# Altium PCB 25E_High_Voltage_Monitor_Rev2.PcbDoc
Units mil, origin at the board's own origin, x right, y up, seen from the top; angles counter-clockwise.
Board outline 5330 x 3160 mil, 2 copper layers (Top Layer, Bottom Layer); 59 components, 26 nets, 150 pads, 54 vias.
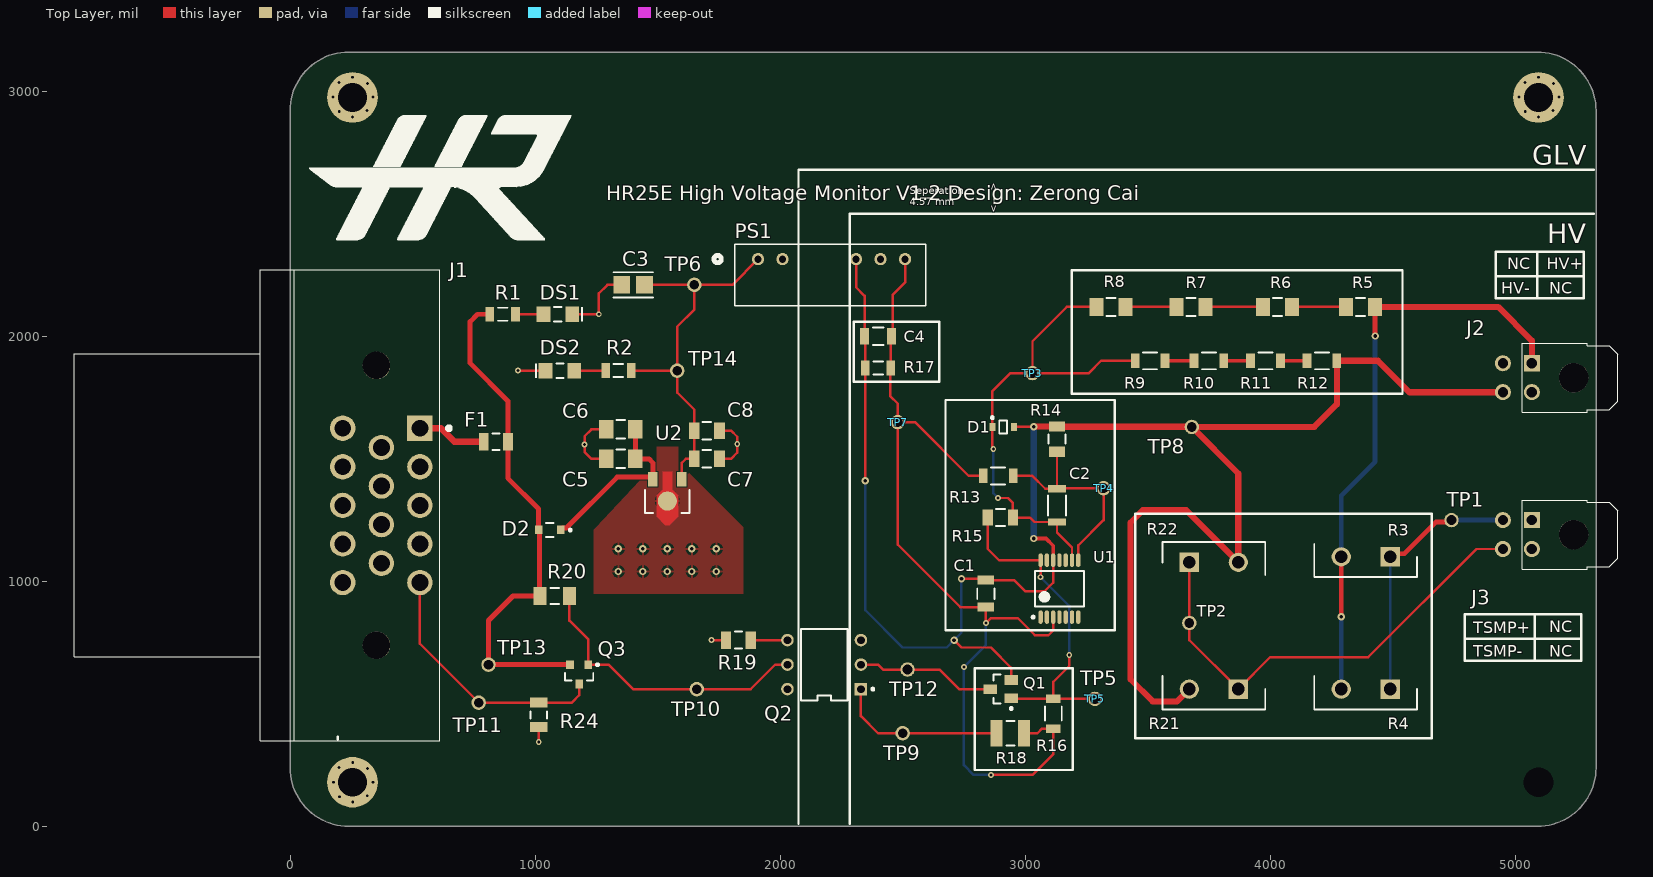
[diagram p0: Top Layer view]
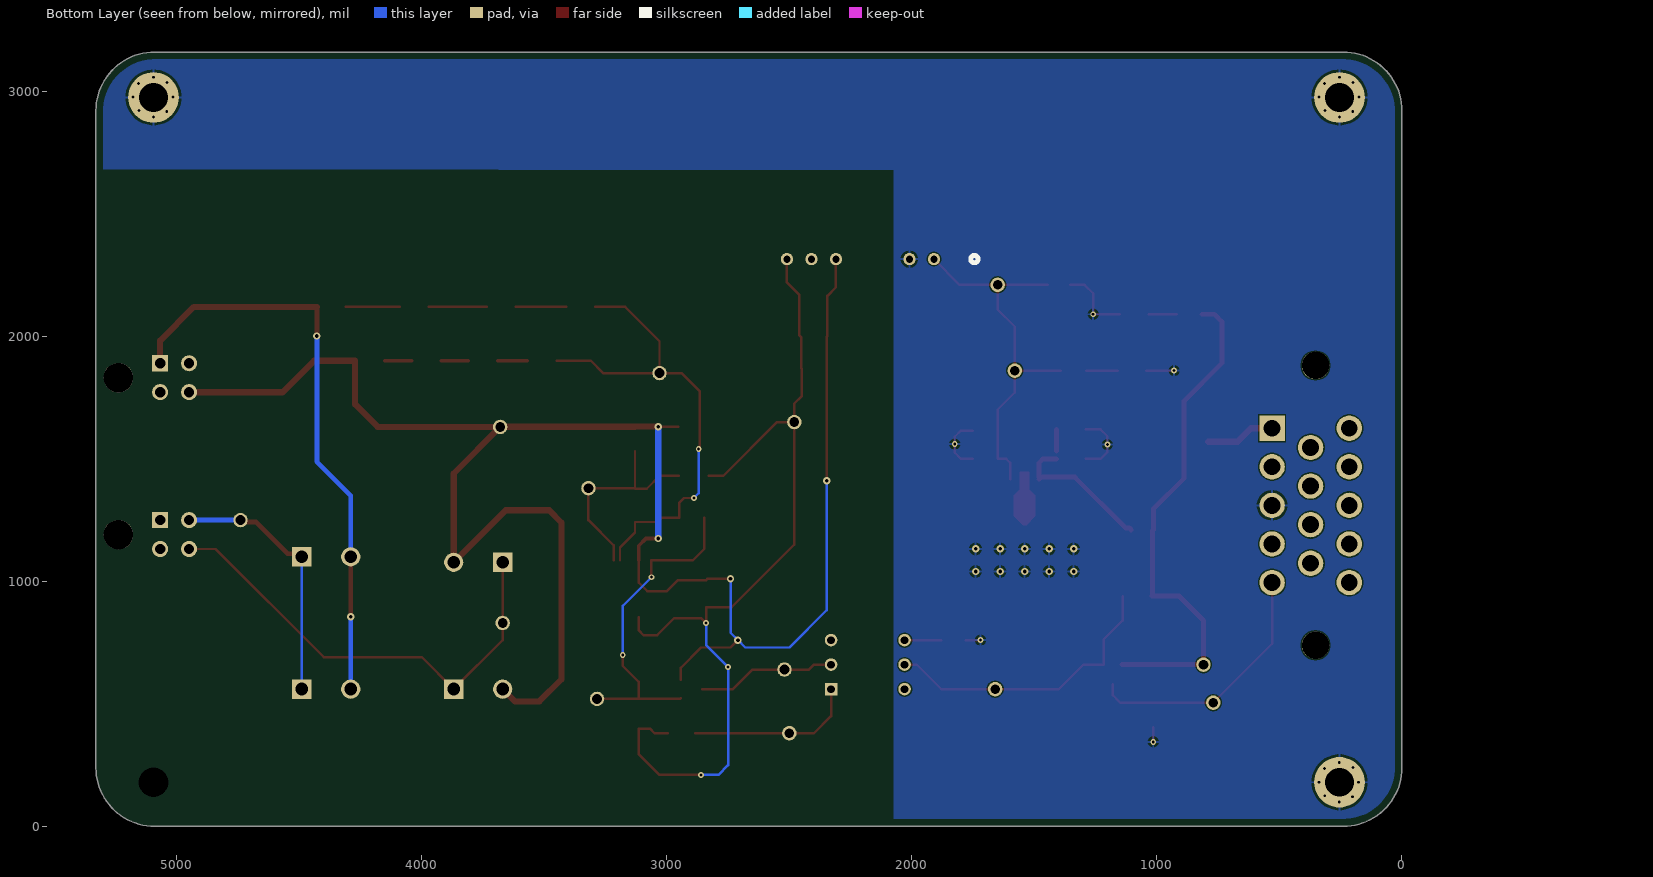
[diagram p1: Bottom Layer view, seen from below]
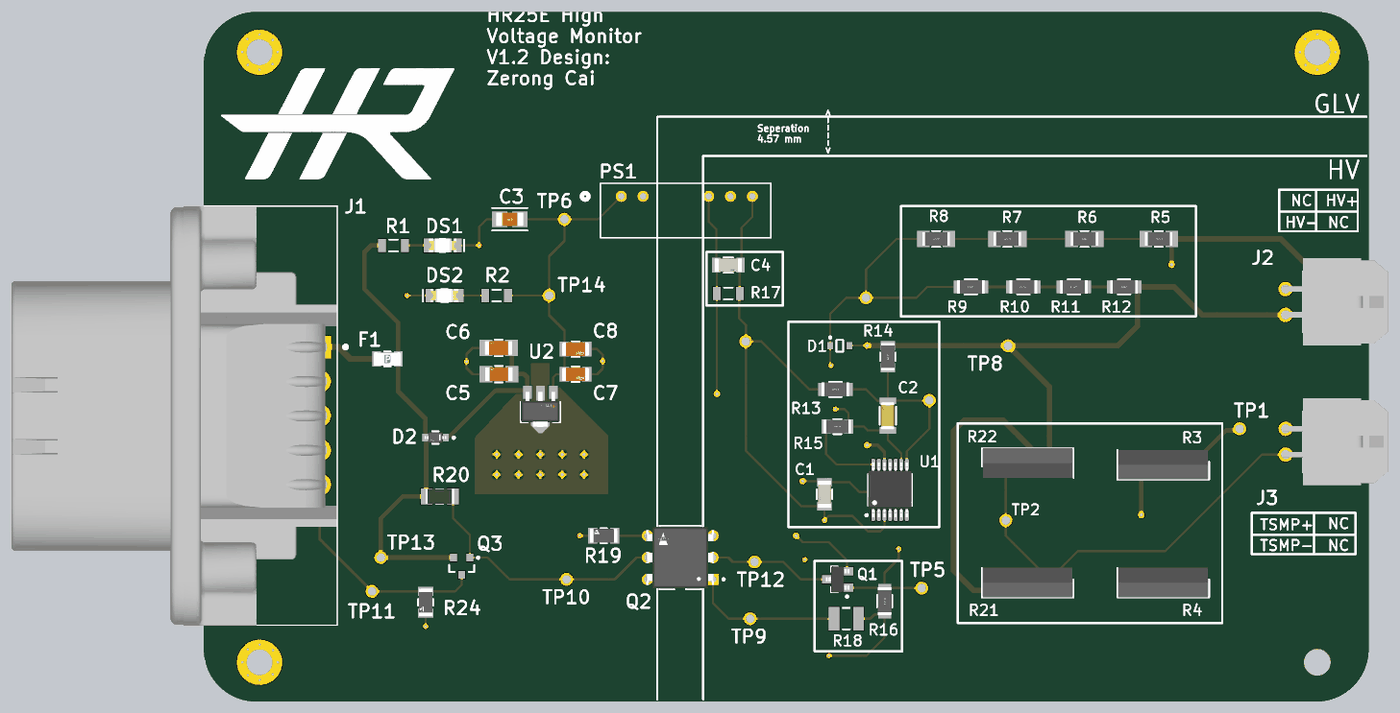
[diagram p2: 3D render of the assembled board from above, using the file's embedded part models]

## Layer stack, top to bottom
Top Solder: solder mask 0.4, Solder Resist, Dk 3.5
Top Layer: signal copper 1.4
Dielectric 1: dielectric 12.6, FR-4, Dk 4.8
Bottom Layer: signal copper 1.4
Bottom Solder: solder mask 0.4, Solder Resist, Dk 3.5

## Board outline
0,240 0,2920 cw(c240,2920) 240,3160 5090,3160 cw(c5090,2920) 5330,2920 5330,240 cw(c5090,240) 5090,0 240,0 cw(c240,240)

## Design rules (kind name [scope] priority, off if disabled: settings)
BoardOutlineClearance [All] p1: gap=30 ignorepadtopadclearanceinfootprint=FALSE except(0: Arc-SplitContinuation Track-SplitContinuation SMDPad-SplitContinuation THPad-SplitContinuation Via-SplitContinuation Fill-SplitContinuation Poly-SplitContinuation Region-SplitContinuation Text-SplitContinuation)
Clearance [All] p1: gap=5 ignorepadtopadclearanceinfootprint=FALSE except(0: Arc-Hole Track-Hole SMDPad-Hole THPad-Hole Via-Hole Fill-Hole Poly-Hole Region-Hole Text-Hole)
Height [All] p1: minheight=0 maxheight=2000 prefheight=500
HoleSize [All] p1: absolutevalues=TRUE maxlimit=200 minlimit=1 maxpercent=80.000 minpercent=20.000
MinimumSolderMaskSliver [All] p1: minsoldermaskwidth=3
PolygonConnect [All] p1: connectstyle=Relief reliefconductorwidth=10 reliefentries=4 polygonreliefangle="90 Angle" airgapwidth=10
RoutingVias [All] p1: holewidth=28 width=50 viastyle="Through Hole" minholewidth=6 minwidth=14 maxholewidth=28 maxwidth=50
SilkToSilkClearance [All] p1: silktosilkclearance=0
SilkToSolderMaskClearance [IsPad] p1: minsilkscreentomaskgap=0 clearancetoexposedcopper=TRUE
SolderMaskExpansion [All] p1: expansion=4 istentingtop=FALSE
Width [All] p1: maxlimit=135 minlimit=6 preferedwidth=10
25 further rules are at their usual default settings.

## Classes and differential pairs
component class GLV-Connectors: F1 J1
component class U_TSMP-Resistors: R3 R4 R21 R22 TP1 TP2
net class HV: ISOLATED-5V NetC2_1 NetC2_2 NetJ2_1 NetPS1_6 NetQ1_1 NetR5_2 NetR6_2 NetR7_2 NetR9_2 NetR10_2 NetR11_2 TS-
component class U_PowerTree: C5 C6 C7 C8 D2 DS1 DS2 R1 R2 TP13 TP14 U2
component class Optocoupler: K1 Q1 Q2 Q3 R18 R19 R20 R24 TP9 TP10 TP11 TP12 U4
component class "Isolated 5V-5V": C3 C4 PS1 R17 TP6 TP7 TP8
component class HV-Trigger: C1 C2 D1 R5 R6 R7 R8 R9 R10 R11 R12 R13 R14 R15 R16 TP3 TP4 TP5 U1
component class HV-Connectors: J2 J3

## Components (designator, comment, footprint, x,y, rotation, side; value= is the part's Value field where it differs from the comment)
C1 "0.1uF" FP-C1206C-EB-MFG 2840,950 r90 top value="0.10 μF"
C2 "0.1uF" FP-CGA5L-0_3-0_1-IPC_B 3130,1310 r90 top
C3 "1uF" FP-C3216-160-0_2-IPC_B 1400,2210 r180 top
C4 "0.1uF" FP-C1206C-EB-MFG 2400,2000 r180 top value="0.10 μF"
C5 "1.0uF" FP-1206-L_3_2_0_2-W_1_6_0-IPC_A 1350,1500 r180 top value=1uF
C6 "1.0uF" FP-1206-L_3_2_0_2-W_1_6_0-IPC_A 1349.09,1620 r180 top
C7 "0.1uF" FP-1206-L_3_2_0_2-W_1_6_0-IPC_C 1701.21,1500 r0 top
C8 "0.1uF" FP-1206-L_3_2_0_2-W_1_6_0-IPC_C 1701.21,1615 r0 top
D1 "MM3Z24VST1G" ONSC-SOD-323-2-477-02_V 2910,1630 r0 top
D2 "1SS404,H3F" FP-SOD-323-MFG 1060,1210 r180 top
DS1 "597-3311-407F" DIAL-597-3311-407F_V 1092.68,2090 r0 top
DS2 "597-3311-407F" DIAL-597-3311-407F_V 1101.34,1860 r180 top
F1 "0468003.NRHF" FP-437-MFG 840,1570 r0 top value=0.033Ω
J1 "Conn-Ampseal-776267-1" FOOTPRINT-AMPSEAL-776267-1 372.48,1309.96 r270 top
J2 "Conn-Molex-43045-0400" FOOTPRINT-MOLEX-43045-0400 5178.35,1830.94 r90 top
J3 "Conn-Molex-43045-0400" FOOTPRINT-MOLEX-43045-0400 5178.35,1190.94 r90 top
PS1 "TMV 0505S" TMV05-SINGLE_TRP 1910,2315 r0 top
Q1 "NDS355AN" FAIR-SOT-3_V 2900,560 r180 top
Q2 "4N37" FP-4N37-MFG 2180,660 r180 top
Q3 "NTR4502PT1G" ONSC-SOT-23-3-318-08_V 1180,620 r270 top
R1 "1.2k" RESC3216X70X50LL05T20 867.83,2090 r0 top
R2 "1.2k" RESC3216X70X50LL05T20 1340,1860 r180 top
R3 "15K" TO508P344X1041X2058-2P 4490,1100 r180 top
R4 "15K" TO508P344X1041X2058-2P 4490,560 r180 top
R5 "240k" FP-KTR18-IPC_A 4369.42,2119.68 r180 top
R6 "240k" FP-KTR18-IPC_A 4030,2119.68 r180 top
R7 "240k" FP-KTR18-IPC_A 3676.67,2119.68 r180 top
R8 "240k" FP-KTR18-IPC_A 3350.9,2119.68 r180 top
R9 "10K" FP-KTR18-MFG 3510,1900 r0 top value=10kR
R10 "10K" FP-KTR18-MFG 3750,1900 r0 top value=10kR
R11 "10K" FP-KTR18-MFG 3981.02,1900 r0 top
R12 "10K" FP-KTR18-MFG 4211.02,1900 r0 top
R13 "180k" FP-KTR18-MFG 2890,1430 r180 top
R14 "160k" FP-KTR18-IPC_C 3130,1580 r90 top
R15 "560K" FP-KTR18-IPC_C 2898.77,1260 r180 top
R16 "10K" FP-KTR18-MFG 3115,460 r90 top
R17 "200" RESC3216X70X50LL05T20 2400,1870 r0 top
R18 "1k" RESC3225X70X50NL20T20 2940,380 r180 top
R19 "100" FP-CRCW1206-e3-MFG 1829.8,760 r180 top
R20 "4.7k" RESC3216X60X45ML15T20 1080,940 r180 top
R21 "15K" TO508P344X1041X2058-2P 3870,560 r180 top
R22 "15K" TO508P344X1041X2058-2P 3669.96,1077.68 r0 top
R24 "20k" FP-CRCW1206-e3-MFG 1015,455 r270 top
TP1 "" FOOTPRINT-GENERIC-TP-VIA-1MM 4740,1250 r0 top
TP2 "" FOOTPRINT-GENERIC-TP-VIA-1MM 3670,830 r90 top
TP3 "" FOOTPRINT-GENERIC-TP-VIA-1MM 3030,1850 r90 top
TP4 "" FOOTPRINT-GENERIC-TP-VIA-1MM 3320,1380 r90 top
TP5 "" FOOTPRINT-GENERIC-TP-VIA-1MM 3285,520 r90 top
TP6 "" FOOTPRINT-GENERIC-TP-VIA-1MM 1650,2210 r90 top
TP7 "" FOOTPRINT-GENERIC-TP-VIA-1MM 2480,1650 r90 top
TP8 "" FOOTPRINT-GENERIC-TP-VIA-1MM 3680,1630 r90 top
TP9 "" FOOTPRINT-GENERIC-TP-VIA-1MM 2500,380 r90 top
TP10 "" FOOTPRINT-GENERIC-TP-VIA-1MM 1660,560 r90 top
TP11 "" FOOTPRINT-GENERIC-TP-VIA-1MM 770,505 r90 top
TP12 "" FOOTPRINT-GENERIC-TP-VIA-1MM 2520,640 r90 top
TP13 "" FOOTPRINT-GENERIC-TP-VIA-1MM 810,660 r90 top
TP14 "" FOOTPRINT-GENERIC-TP-VIA-1MM 1580,1860 r90 top
U1 "OpAmp Comparator Quad - TLV1704" TSOP65P640X120-14N 3140,970 r90 top
U2 "UA78L05CPK" FP-PK0003A-MFG 1540,1330 r180 top

## Footprints (in the part's own frame and the unit in brackets; to place one, negate y for a bottom-side part, rotate by r counter-clockwise, add the part's x,y. Pads: shape width x height; smd on the part's side, far side on the other; paste and mask are expansions set on the pad)
DIAL-597-3311-407F_V [mm] "SMD, 2-Leads, Body 1.5x3mm"
  rect 1.42x1.6 smd: 1(-1.49,0) 2(1.49,0)
  silkscreen extent -0.38,-0.75 2.6,0.75, body extent -1.6,-0.8 1.6,0.8, height 0.68
FAIR-SOT-3_V [mm] "SOT23, 3-Leads, Body 3.04x1.52mm, Pitch 0.95mm"
  rect 1.4x1 smd: 1(-1.1,0.95) 2(-1.1,-0.95) 3(1.1,0)
  silkscreen extent -1.23,-1.5 0.76,2.12, body extent -1.36,-1.52 1.36,1.52, height 1.12
FOOTPRINT-AMPSEAL-776267-1 [mm] "14 CKT RA GASKET SEALED AUTO"
  rect 2.625x2.625 hole 1.75: 1(-8,4)
  round 2.625 hole 1.75: 2(-4,4) 3(0,4) 4(4,4) 5(8,4) 6(-6,0) 7(-2,0) 8(2,0) 9(6,0) 10(-8,-4) 11(-4,-4) 12(0,-4) 13(4,-4) 14(8,-4)
  round 2.85 hole 2.85 unplated: None(-14.5,-0.5) None(14.5,-0.5)
  silkscreen extent -24.4,-31.85 24.4,7.2, body extent -24.38,-31.82 24.42,5.98, height 28.75
FOOTPRINT-GENERIC-TP-VIA-1MM [mm]
  round 1.5 / inner round 1.524 / far side round 1.5 hole 1: 1(0,0)
FOOTPRINT-MOLEX-43045-0400 [mm] "Molex Microfit 4 CKT RA"
  rect 1.67x1.67 hole 1.07: 1(1.5,2.8)
  round 1.67 hole 1.07: 2(-1.5,2.8) 3(1.5,5.8) 4(-1.5,5.8)
  round 3.05 hole 3.05 unplated: None(0,-1.52)
  silkscreen extent -3.57,-6.12 3.57,3.79, body extent -5.07,-6.12 5.08,6.12, height 8.64
FP-4N37-MFG [mm]
  rect 1.3x1.3 hole 0.8 paste-1000 mask+0: 1(-3.81,2.54)
  round 1.3 hole 0.8 paste-1000 mask+0: 2(-3.81,0) 3(-3.81,-2.54) 4(3.81,-2.54) 5(3.81,0) 6(3.81,2.54)
  silkscreen extent -5.16,-3.71 2.4,3.71, body extent -4.56,-3.81 4.56,3.81, height 0.25
FP-437-MFG [mm]
  rect 1x1.8 smd paste+0 mask+0: 1(-1.25,0) 2(1.25,0)
  silkscreen extent -0.38,-0.86 0.38,0.86, body extent -1.85,-1 1.85,1, height 0.25
FP-1206-L_3_2_0_2-W_1_6_0-IPC_A [mil]
  rect 59.24x75.05 smd paste+0 mask+0: 1(-59.09,0) 2(59.09,0)
  silkscreen extent -18,-38 18,38, body extent -108,-57 108,57, height 10
FP-1206-L_3_2_0_2-W_1_6_0-IPC_C [mil]
  rect 43.49x67.17 smd paste+0 mask+0: 1(-51.21,0) 2(51.21,0)
  silkscreen extent -18,-35 18,35, body extent -77,-39 77,39, height 10
FP-C1206C-EB-MFG [mm]
  rect 0.95x1.7 smd paste+0 mask+0: 1(-1.4,0) 2(1.4,0)
  silkscreen extent -0.55,-0.9 0.55,0.9, body extent -2,-1 2,1, height 0.25
FP-C3216-160-0_2-IPC_B [mil]
  rect 69.05x71.11 smd paste+0 mask+0: 1(-46.3,0) 2(46.3,0)
  silkscreen extent -81,-51 81,51, body extent -91,-45 91,45, height 10
FP-CGA5L-0_3-0_1-IPC_B [mm]
  rect 0.756x1.906 smd paste+0 mask+0: 1(-1.725,0) 2(1.725,0)
  silkscreen extent -1.05,-0.95 1.05,0.95, body extent -2.35,-1.2 2.35,1.2, height 0.25
FP-CRCW1206-e3-MFG [mm]
  rect 1.05x1.8 smd paste+0 mask+0: 1(-1.275,0) 2(1.275,0)
  silkscreen extent -0.38,-0.87 0.38,0.87, body extent -1.9,-1 1.9,1, height 0.25
FP-KTR18-IPC_A [mil]
  rect 57.31x73.16 smd paste+0 mask+0: 1(-59.1,0) 2(59.1,0)
  silkscreen extent -19,-37 19,37, body extent -107,-56 107,56, height 10
FP-KTR18-IPC_C [mil]
  rect 41.56x65.28 smd paste+0 mask+0: 1(-51.23,0) 2(51.23,0)
  silkscreen extent -19,-34 19,34, body extent -76,-38 76,38, height 10
FP-KTR18-MFG [mm]
  rect 0.9x1.5 smd paste+0 mask+0: 1(-1.55,0) 2(1.55,0)
  silkscreen extent -0.72,-0.87 0.72,0.87, body extent -2.1,-0.97 2.1,0.97, height 0.25
FP-PK0003A-MFG [mm]
  rect 1x1.5 smd paste+0 mask+0: 1(-1.5,-2.203) 3(1.5,-2.203)
  round 1.98 smd paste+0 mask+0: 2(0,0.058)
  Top Layer region: 0,-2.953 -0.5,-2.953 -0.5,-1.152 -1.1,-0.553 -1.1,1.647 -0.2,2.548 0.2,2.548 1.1,1.647 1.1,-0.553 0.5,-1.152 0.5,-2.953
  silkscreen extent -2.3,-1.08 2.3,1.3, body extent -2.55,-3.05 2.55,2.65, height 0.25
FP-SOD-323-MFG [mm]
  rect 0.8x0.9 smd paste+0 mask+0: 1(-1.15,0) 2(1.15,0)
  silkscreen extent -2.25,-0.72 0.38,0.72, body extent -1.65,-0.82 1.65,0.82, height 0.25
ONSC-SOD-323-2-477-02_V [mm] "SOD, 2-Leads, Body 1.7x1.25mm"
  rect 0.63x0.83 smd: 1(-1.115,0) 2(1.115,0)
  silkscreen extent -1.24,-0.67 0.4,1.09, body extent -0.85,-0.63 0.85,0.63, height 1.06
ONSC-SOT-23-3-318-08_V [mm] "SOT23, 3-Leads, Body 2.92x1.3mm, Pitch 0.95mm"
  rect 0.9x0.8 smd: 1(-1,0.95) 2(-1,-0.95) 3(1,0)
  silkscreen extent -1.12,-1.46 0.65,2.03, body extent -0.65,-1.46 0.65,1.46, height 1.11
RESC3216X60X45ML15T20 [mm] "Chip Resistor, 2-Leads, Body 3.3x1.75mm, IPC Low Density"
  rect 1.35x1.85 smd: 1(-1.525,0) 2(1.525,0)
  silkscreen extent -0.45,-0.82 0.45,0.82, body extent -1.65,-0.87 1.65,0.87, height 0.6
RESC3216X70X50LL05T20 [mm] "Chip Resistor, 2-Leads, Body 3.20x1.60mm, IPC High Density"
  rect 0.9x1.55 smd: 1(-1.325,0) 2(1.325,0)
  silkscreen extent -0.5,-0.67 0.5,0.67, body extent -1.63,-0.82 1.62,0.82, height 0.7
RESC3225X70X50NL20T20 [mm] "Chip Resistor, 2-Leads, Body 3.20x2.50mm, IPC Medium Density"
  rect 1.25x2.7 smd: 1(-1.425,0) 2(1.425,0)
  silkscreen extent -0.4,-1.25 0.4,1.25, body extent -1.7,-1.35 1.7,1.35, height 0.7
TMV05-SINGLE_TRP [mil]
  round 50 hole 30 mask+0: 1(0,0) 2(100,0) 5(400,0) 6(500,0) 7(600,0)
  silkscreen extent -180,-190 685,60, body extent 0,0 10,10, height 10
TO508P344X1041X2058-2P [mm]
  rect 1.995x1.995 / inner round 1.995 / far side rect 1.995x1.995 hole 1.33: 1(0,0)
  round 1.995 hole 1.33: 2(5.08,0)
  silkscreen extent -2.8,-1.34 7.88,2.1, body extent -2.67,-1.34 7.75,2.1, height 19.56
TSOP65P640X120-14N [mm] "TSOP, 14-Leads, Body 5.00x4.40mm, Pitch 0.65mm, IPC Medium Density"
  oval 1.4x0.45 smd: 1(-2.95,1.95) 2(-2.95,1.3) 3(-2.95,0.65) 4(-2.95,0) 5(-2.95,-0.65) 6(-2.95,-1.3) 7(-2.95,-1.95) 8(2.95,-1.95) 9(2.95,-1.3) 10(2.95,-0.65) 11(2.95,0) 12(2.95,0.65) 13(2.95,1.3) 14(2.95,1.95)
  silkscreen extent -3.07,-2.55 1.85,2.85, body extent -3.2,-2.55 3.2,2.55, height 1.2

## Part data
C1 C4: library part CMP-1037-04229-2, "CAP CER 0.1UF 250V X7R 1206", Capacitance="0.10 μF", Manufacturer=KEMET, Manufacturer Part Number=C1206C104KARACTU, Package=C1206C-EB, Temperature="-55°C to +150°C", Temperature Characteristic=X7R, Temperature Coefficient=15%, Temperature Range High=+150°C, Temperature Range Low=-55°C, Tolerance=0.1, Voltage Rating="250 V", Automotive=Yes, Automotive Grade="Grade 0", Category=Cap, ComponentLink2Description=Datasheet, ComponentLink2URL=https://content.kemet.com/datasheets/KEM_C1007_X8R_ULTRA_150C_SMD.pdf, Device Class L1="Passive Components", Device Class L2=Capacitors, Device Class L3="Ceramic Capacitors", Digikey Description="CAP CER 0.1UF 250V X7R 1206", Height=0.88mm, Ipc Land Pattern Name=CAPC320160X78, Lead Free=Yes, Material=Ceramic, Mouser Description="Multilayer Ceramic Capacitors MLCC - SMD/SMT 250volts 0.1uF X7R 10%", Octopart=https://octopart.com/c1206c104karactu-kemet-193627, RoHS=TRUE
C2: library part CMP-08246-001673-1, "Cap Ceramic 100nF 450V X7T 10% Pad SMD 1206 +125°C Automotive T/R", Capacitance=100nF, Case Code (Imperial)=1206, Case Code (Metric)=3216, Dielectric=X7T, Max Operating Temperature=125°C, Min Operating Temperature=-55°C, Package Quantity=1, Ratings=AEC-Q200, Tolerance=10%, Voltage Rating=450V, Case/Package=1206, Depth=1.6mm, Features="Soft Termination", Height=1.6mm, Lead Free="Lead Free", Length=3.2mm, Mount="Surface Mount", Packaging="Tape and Reel", REACH SVHC="No SVHC", Termination=SMD/SMT, Thickness=0.075inch, Voltage Rating (DC)=450V, Weight=0.000571oz, Width=0.063inch
C3: library part CMP-2000-05402-2, "Multilayer Ceramic Capacitors 1uF ±10% 50V X7R SMD 1206", Case Code (Imperial)=1206, Case Code (Metric)=3216, Dielectric=X7R, Dielectric Material=Ceramic, Max Operating Temperature=125°C, Min Operating Temperature=-55°C, Package Quantity=2000, Tolerance=10%, Voltage=25V, Voltage Rating=50V, Capacitance=1uF, Case/Package=1206, Depth=1.6mm, Height=1.6mm, Lead Free="Lead Free", Length=0.126inch, Mount="Surface Mount", Number of Pins=2, Packaging="Tape and Reel", Radiation Hardening=No, REACH SVHC="No SVHC", Resistor Type=Ceramic, RoHS Compliant=Yes, Series=C, Termination=SMD/SMT, Thickness=0.071inch, Voltage Rating (DC)=50V, Weight=0.000571oz, Width=0.063inch
C5: library part CMP-2000-05866-2, "General Purpose Ceramic Capacitor, 1206, 1uF, 10%, X7R, 15%, 50V", Capacitance=1uF, Capacitor Type=Ceramic, Case Code (Imperial)=1206, Case Code (Metric)=3216, Dielectric=X7R, Manufacturer="Kyocera AVX", Manufacturer Part Number=12065C105KAT2A, Max Operating Temperature=125°C, Min Operating Temperature=-55°C, Package Quantity=1, Package Shape=Rectangular, Package Style=SMTMeter, Rated DC Voltage (URdc)=50V, Supplier Part Number=478-KGM31HR71H105KUCT-ND, Tolerance=10%, Voltage=25V, Case/Package=1206, Category="Ceramic Capacitors", ComponentLink1Description=https://datasheet.ciiva.com:443/pdfs/VipMasterIC/IC/AVXC/AVXC-S-A0004824845/AVXC-S-A0004824845-1.pdf?src-supplier=IHS+Markit, ComponentLink1URL=https://datasheet.ciiva.com:443/pdfs/VipMasterIC/IC/AVXC/AVXC-S-A0004824845/AVXC-S-A0004824845-1.pdf?src-supplier=IHS+Markit, Construction=Flat, Contact Plating=Tin, Depth=1.6mm, Dielectric Material=Ceramic, Dissipation Factor=2.5%, Height=1.78mm, JESD-609 Code=e3, Lead Free="Lead Free", Length=3.2mm, Mount="Surface Mount", Mounting Technology="Surface Mount", Multilayer=Yes, Number of Pins=2, Packaging="Tape and Reel", Pins=2, Pricing="1=0.36, 10=0.212, 100=0.1385, 1000=0.10054, 2000=0.09094, 4000=0.08697, 6000=0.08446, 10000=0.08191, 14000=0.08036, 20000=0.07843, 50000=0.07526, 100000=0.07178 (USD)", Radiation Hardening=No, REACH SVHC="No SVHC", Reach SVHC Compliant=Yes, RoHS=Yes, RoHS Compliant=Yes, Series=-, Stock=33721, Supplier=Digikey, Temperature Characteristics Code=X7R, Terminal Finish=Nickel, Termination=SMD/SMT, Thickness=0.07inch, Tolerance  (fill in as +-)=10%, Tolerance (fill in as +-)=10%, Voltage Rating=50V, Voltage Rating (DC)=50V, Width=0.063inch
C6: library part CMP-2000-05866-2, "General Purpose Ceramic Capacitor, 1206, 1uF, 10%, X7R, 15%, 50V", Capacitance=1uF, Case Code (Imperial)=1206, Case Code (Metric)=3216, Dielectric=X7R, Max Operating Temperature=125°C, Min Operating Temperature=-55°C, Package Quantity=1, Tolerance=10%, Voltage=25V, Voltage Rating=50V, Case/Package=1206, Construction=Flat, Contact Plating=Tin, Depth=1.6mm, Dissipation Factor=2.5%, Height=1.78mm, Lead Free="Lead Free", Length=3.2mm, Mount="Surface Mount", Number of Pins=2, Packaging="Tape and Reel", Radiation Hardening=No, REACH SVHC="No SVHC", RoHS Compliant=Yes, Series=-, Termination=SMD/SMT, Thickness=0.07inch, Voltage Rating (DC)=50V, Width=0.063inch
C7 C8: library part CMP-04427-013576-1, "General Purpose Ceramic Capacitor, 1206, 100nF, 5%, X7R, 15%, 100V", Capacitance=100nF, Case Code (Imperial)=1206, Case Code (Metric)=3216, Dielectric=X7R, Dielectric Material=Ceramic, Max Operating Temperature=125°C, Min Operating Temperature=-55°C, Package Quantity=1, Tolerance=5%, Voltage=100V, Case/Package=1206, Construction=Flat, Contact Plating=Tin, Depth=1.6mm, Height=1.27mm, Lead Free="Lead Free", Length=3.2mm, Mount="Surface Mount", Number of Pins=2, Packaging="Tape and Reel", Radiation Hardening=No, REACH SVHC="No SVHC", RoHS Compliant=Yes, Series=-, Termination=SMD/SMT, Thickness=0.05inch, Voltage Rating=100V, Voltage Rating (DC)=100V, Width=0.063inch
D1: library part CMP-1060-00674-1, "Zener Voltage Regulator, 300 mW, 2-Pin SOD-323, Pb-Free, Tape and Reel", Manufacturer="On Semiconductor", PartNumber=MM3Z36VT1G, ComponentLink1Description="Manufacturer URL", ComponentLink1URL=http://www.onsemi.com/, ComponentLink2Description=Datasheet, ComponentLink2URL=http://www.onsemi.cn/pub_link/Collateral/MM3Z2V4T1-D.PDF, ComponentLink3Description="Package Specification", ComponentLink3URL=http://www.onsemi.com/pub_link/Collateral/477-02.PDF.1, DatasheetVersion="Rev. 9", Mounting Technology="Surface Mount", P Max (W)=0.3, PackageDescription="2-Pin SOD, Body 1.7 x 1.25 mm", PackageReference=SOD-323-2-477-02, PackageVersion="Rev. H, 03/2007", Packing="Tape and Reel", RoHS=Pb-Free, VZ Typ (V)=36
D2: library part CMP-35905-000002-1, "DIODE SCHOTTKY 20V 300MA USC", Average Rectified Current=300mA, Case/Package=SOD, Max Operating Temperature=100°C, Max Repetitive Reverse Voltage (Vrrm)=25V, Max Reverse Voltage (DC)=20V, Min Operating Temperature=-40°C, Contact Plating=Tin, Element Configuration=Single, Forward Current=300mA, Mount="Surface Mount", Packaging="Tape and Reel"
DS1 DS2: library part CMP-007-00045-2, "Single Color LED, Green, Water Clear, 2mm", Forward Voltage=2.5V, Max Operating Temperature=85°C, Min Operating Temperature=-30°C, Mounting Technology="Surface Mount", Pins=2, RoHS Compliant=Yes
F1: library part CMP-08605-000049-1, "FUSE BRD MNT 3A 32VAC 35VDC 1206", Fuse Current=3A, Fuse Interrupt Ac Current=50A, Fuse Voltage Drop=0.14V, Manufacturer="Littelfuse Inc", Manufacturer Part Number=0437003.WR, Max Fuse Ac Voltage=32V, Max Fuse Dc Voltage=35V, Package=437, Resistance=0.033Ω, Temperature="-55°C to +150°C", Temperature Range High=+150°C, Temperature Range Low=-55°C, Automotive=No, Category=Fuse, ComponentLink2Description=Datasheet, ComponentLink2URL=https://www.littelfuse.com/~/media/electronics/datasheets/fuses/littelfuse_fuse_437_datasheet.pdf.pdf, Device Class L1="Circuit Protection", Device Class L2=Fuses, Device Class L3=unset, Digikey Description="FUSE BRD MNT 3A 32VAC 35VDC 1206", Fuse Blow Speed=Fast, Fuse I2T=0.506A2Sec, Fuse Interrupt Dc Current=50A, Height=0.8639mm, Ipc Land Pattern Name=CAPC320163X82, Lead Free=Yes, Mouser Description="Surface Mount Fuses 32V FA 1206 3A", Octopart=https://octopart.com/0437003.wr-littelfuse-8600121, RoHS=TRUE, Voltage Rating=32V
J1: library part CMP-035-000002-1, "AMPSEAL RA 14ckt Faced w/ Gasket Automotive", Package=None, Availability=Unavailable, Design Item ID=Conn-Ampseal-776267-1, EU_RoHS_Compliance=Compliant, MF="TE Connectivity", MP=776267-1, Price=None, SnapEDA_Link=https://www.snapeda.com/parts/776267-1/TE%20Connectivity%20AMP%20Connectors/view-part/?ref=snap, Source=Connectors.SchLib, TE_purchase_URL=https://www.te.com/usa-en/product-776267-1.html?te_bu=Cor&te_type=disp&te_campaign=seda_glo_cor-seda-global-disp-prtnr-fy19-seda-model-bom-cta_sma-317_1&elqCampaignId=32493
J2 J3: library part CMP-035-000005-2, "Microfit RA 4ckt Std/Econ", Package=None, Availability=Unavailable, Design Item ID=Conn-Molex-43045-0400, MF=Molex, MP=43045-0400, Price=None, SnapEDA_Link=https://www.snapeda.com/parts/43045-0400/Molex/view-part/?ref=snap, Source=Connectors.SchLib
PS1: library part CMP-053-000000-4, "No Description Available", Built_By=EMA_Justin, Copyright="Copyright (C) 2018 Accelerated Designs. All rights reserved", Datasheet=https://www.mouser.com/datasheet/2/687/tmv-519347.pdf, Design Item ID="TMV 0505S", Manufacturer_Part_Number="TMV 0505S", RefDes=RefDes, Source=2021-05-26_16-57-50.SchLib, SourceLibrary=Traco_Power_2020-05-29, Type=DEV, Vendor="Traco Power"
Q1: library part CMP-2000-06834-1, "N-Channel Logic Level Enhancement Mode Field Effect Transistor, 30 V, 1.7 A, -55 to150 degC, 3-Pin SOT-3, RoHS, Tape and Reel", Manufacturer=FairchildSemiconductor, Maximum Continuous Drain Current=1.7A, Maximum Drain Source Voltage=30V, Maximum Gate Source Voltage=±20V, Operating Temperature=-55to150°C, Package=3SuperSOT, Package Description="3-Pin Small Outline Transistor, Body 2.92 x 1.4 mm, Pitch 0.95 mm", Package Reference=SOT-3, Category=MOSFET, Channel Mode=Enhancement, Channel Type=N, Datasheet URL=https://www.fairchildsemi.com/datasheets/ND/NDS355AN.pdf, Datasheet Version=01/1997, Manufacturer URL=https://www.fairchildsemi.com/, Mounting=SurfaceMount, Mounting Technology=SurfaceMount, Package URL=https://www.fairchildsemi.com/package-drawings/MA/MA03B.pdf, Packaging=Tape&Reel, RDS-on=85@10VmOhm, Typical Fall Time=5ns, Typical Rise Time=32ns, Typical Turn-Off Delay Time=13ns, Typical Turn-On Delay Time=10ns
Q2: library part CMP-2000-05615-2, Case/Package=PDIP, Collector Emitter Breakdown Voltage=30V, Current Transfer Ratio=50%, Forward Current=50mA, Forward Voltage=1.5V, Input Current=10mA, Isolation Voltage=5kV, Max Collector Current=100mA, Max Operating Temperature=100°C, Max Power Dissipation=70mW, Min Operating Temperature=-55°C, Reverse Breakdown Voltage=6V, Voltage Rating (DC)=1.3V, Approvals="BSI, FIMKO, UL", Collector Emitter Voltage (VCEO)=30V, Fall Time=10µs, Lead Free="Lead Free", Max Input Current=50mA, Max Output Voltage=30V, Mount="Through Hole", NexarPartId=55433899, Number of Channels=1, Number of Elements=1, Number of Pins=6, Output Current per Channel=50mA, Output Voltage=30V, Power Dissipation=70mW, Radiation Hardening=No, REACH SVHC=Unknown, Rise Time=10µs, RoHS=Compliant, Schedule B="8541408000, 8541408000"
Q3: library part CMP-1058-00734-1, "Power MOSFET, -30 V, -1.95 A, Single, P-Channel, 3-Pin SOT-23, Pb-Free, Tape and Reel", Manufacturer="On Semiconductor", Package Type=SOT-23-3, Channel Polarity="P Channel", Ciss Typ (pF)=200, ComponentLink1Description="Manufacturer URL", ComponentLink1URL=http://www.onsemi.com/, ComponentLink2Description=Datasheet, ComponentLink2URL=http://www.onsemi.cn/pub_link/Collateral/NTR4502P-D.PDF, ComponentLink3Description="Package Specification", ComponentLink3URL=http://www.onsemi.cn/pub_link/Collateral/318-08.PDF, Configuration=Single, Coss Typ (pF)=80, Crss Typ (pF)=50, DatasheetVersion="Rev. 5", ID Max (A)=1.95, Mounting Technology="Surface Mount", PackageDescription="3-Pin Small Outline Transistor, Body 2.92 x 1.3 mm, Pitch 0.95 mm", PackageReference=SOT-23-3-318-08, PackageVersion="Rev. AP, 11/2009", Packing="Tape and Reel", PartNumber=NTR4502PT1G, RoHS=Pb-Free, V(BR)DSS Min (V)=30, VGS Max (V)=20, VGS(th) Max (V)=3
R1 R2: library part CMP-2003-00061-1, Manufacturer=Panasonic, Part Number=ERJ8ENF1201V
R3 R4 R21 R22: library part MP925-15.0K-1%, "Thick Film Resistors - Through Hole 15K ohm 25W 1% TO-220 PKG PWR FILM", Manufacturer_Name=Caddock, Mouser Part Number=684-MP925-15K, Supplier Part Number 1=MP925-15.0KF-ND, Datasheet Link=http://www.caddock.com/Online_catalog/Mrktg_Lit/MP9000_Series.pdf, Geometry.Height=3.44mm, Manufacturer_Part_Number=MP925-15.0K-1%, Mouser Price/Stock=https://www.mouser.co.uk/ProductDetail/Caddock/MP925-15.0K-1?qs=3xGhc7tteJWFgUsHgFGqHw%3D%3D, Supplier 1=Digikey
R5 R6 R7 R8: library part CMP-08839-030423-1, "Res Thick Film 1206 240kΩ 1% 0.1W ±100ppm/°C Automotive Paper T/R", Case Code (Imperial)=1206, Case Code (Metric)=3216, Max Operating Temperature=155°C, Max Power Dissipation=250mW, Min Operating Temperature=-55°C, Package Quantity=1, Resistance=240kR, Resistor Type="Thick Film", Temperature Coefficient=100ppm/°C, Tolerance=1%, Case/Package=1206, Features="Automotive AEC-Q200", Height=0.026inch, Length=0.126inch, Number of Terminations=2, Packaging="Cut Tape", RoHS Compliant=Yes, Series=KTR, Width=0.063inch
R9 R10: library part CMP-08839-030597-1, "Res Thick Film 1206 10kΩ 1% 0.1W ±100ppm/°C Automotive Paper T/R", Case Code (Imperial)=1206, Case Code (Metric)=3216, Manufacturer=Rohm, Manufacturer Part Number=KTR18EZPF1002, Max Operating Temperature=155°C, Max Power Dissipation=250mW, Min Operating Temperature=-55°C, Package Height=0.55mm, Package Length=3.2mm, Package Quantity=1, Package Shape=Rectangular, Package Width=1.6mm, Rated Temperature=70°C, Resistance=10kR, Resistor Type="Thick Film", Supplier Part Number=755-KTR18EZPF1002, Temperature Coefficient=100ppm/°C, Temperature Coefficient (ppm/Cel)=100, Tolerance=1%, Working Voltage=500V, Case/Package=1206, Category="Chip SMD Resistors", ComponentLink1Description=https://datasheet.ciiva.com:443/pdfs/VipMasterIC/IC/ROHM/ROHM-S-A0008988694/ROHM-S-A0008988694-1.pdf?src-supplier=IHS+Markit, ComponentLink1URL=https://datasheet.ciiva.com:443/pdfs/VipMasterIC/IC/ROHM/ROHM-S-A0008988694/ROHM-S-A0008988694-1.pdf?src-supplier=IHS+Markit, ComponentLink2Description=https://datasheet.ciiva.com/2470/ktr-2470612.pdf?src-supplier=Digikey, ComponentLink2URL=https://datasheet.ciiva.com/2470/ktr-2470612.pdf?src-supplier=Digikey, ComponentLink3Description=https://datasheet.ciiva.com/2470/ktr-2470613.pdf?src-supplier=Digikey, ComponentLink3URL=https://datasheet.ciiva.com/2470/ktr-2470613.pdf?src-supplier=Digikey, ComponentLink4Description=https://datasheet.ciiva.com/2470/ktr-2470614.pdf?src-supplier=Digikey, ComponentLink4URL=https://datasheet.ciiva.com/2470/ktr-2470614.pdf?src-supplier=Digikey, Construction=Rectangular, Features="Automotive AEC-Q200", Height=0.026inch, JESD-609 Code=e3, Length=0.126inch, Mounting Technology="Surface Mount", Number of Terminations=2, Packaging="Tape and Reel", Pins=2, Power=250mW, Pricing="1=0.21, 10=0.105, 50=0.105, 100=0.062, 1000=0.038, 10000=0.03 (USD)", Reach SVHC Compliant=Yes, Reference Standard="TS 16949", RoHS=Yes, RoHS Compliant=Yes, Series=KTR, Stock=9747, Supplier=Mouser, Terminal Finish=Tin, Termination=Wraparound, Width=0.063inch
R11 R12 R16: library part CMP-08839-030597-1, "Res Thick Film 1206 10kΩ 1% 0.1W ±100ppm/°C Automotive Paper T/R", Case Code (Imperial)=1206, Case Code (Metric)=3216, Max Operating Temperature=155°C, Max Power Dissipation=250mW, Min Operating Temperature=-55°C, Package Quantity=1, Resistance=10kR, Resistor Type="Thick Film", Temperature Coefficient=100ppm/°C, Tolerance=1%, Case/Package=1206, Features="Automotive AEC-Q200", Height=0.026inch, Length=0.126inch, Number of Terminations=2, Packaging="Tape and Reel", RoHS Compliant=Yes, Series=KTR, Width=0.063inch
R13: library part CMP-08839-001270-1, "Res Thick Film 1206 180kΩ 1% 0.1W ±100ppm/°C Automotive Paper T/R", Case Code (Imperial)=1206, Case Code (Metric)=3216, Max Operating Temperature=155°C, Max Power Dissipation=250mW, Min Operating Temperature=-55°C, Package Quantity=5000, Resistance=180kR, Resistor Type="Thick Film", Temperature Coefficient=100ppm/°C, Tolerance=1%, Case/Package=1206, Features="Automotive AEC-Q200", Height=0.026inch, Length=0.126inch, Number of Terminations=2, Packaging="Cut Tape", RoHS Compliant=Yes, Series=KTR, Width=0.063inch
R14: library part CMP-08839-002259-1, "Res Thick Film 1206 160kΩ 1% 0.1W ±100ppm/°C Automotive Paper T/R", Case Code (Imperial)=1206, Case Code (Metric)=3216, Max Operating Temperature=155°C, Max Power Dissipation=250mW, Min Operating Temperature=-55°C, Package Quantity=5000, Resistance=160kR, Resistor Type="Thick Film", Temperature Coefficient=100ppm/°C, Tolerance=1%, Case/Package=1206, Features="Automotive AEC-Q200", Height=0.026inch, Length=0.126inch, Number of Terminations=2, Packaging="Cut Tape", RoHS Compliant=Yes, Series=KTR, Width=0.063inch
R15: library part CMP-08839-031201-1, "Res Thick Film 1206 560kΩ 1% 0.1W ±100ppm/°C Automotive Paper T/R", Case Code (Imperial)=1206, Case Code (Metric)=3216, Max Operating Temperature=155°C, Max Power Dissipation=250mW, Min Operating Temperature=-55°C, Resistance=560kR, Resistor Type="Thick Film", Temperature Coefficient=100ppm/°C, Tolerance=1%, Case/Package=1206, Features="Automotive AEC-Q200", Number of Terminations=2, Packaging="Tape and Reel", RoHS Compliant=Yes, Series=KTR
R17: library part CMP-2003-00194-1, "Fixed Resistor, Metal Glaze/thick Film, 0.25W, 200ohm, 200V, 1% +/-Tol, 100ppm/Cel, Surface Mount, 1206", Manufacturer=Panasonic, Part Number=ERJ-8ENF2000V
R18: library part CMP-2005-01957-1, "360 Ohms ±1% 0.333W, 1/3W, FOOTPRINT-1210-GENERIC", Part Number=KTR25JZPF3600
R19: library part CMP-2003-04801-2, "RES Thick Film, 100Ω, 1%, 0.25W, 100ppm/°C, 1206", Case Code (Imperial)=1206, Case Code (Metric)=3216, Max Operating Temperature=155°C, Min Operating Temperature=-55°C, Package Quantity=5000, Power Rating=250mW, Resistance=100R, Temperature Coefficient=100ppm/°C, Tolerance=1%, Voltage Rating=200V, Case/Package=1206, Composition="Thick Film", Contact Plating=Tin, Depth=1.6mm, Height=0.55mm, Lead Free="Lead Free", Length=3.2mm, Military Standard=Not, Mount="Surface Mount", Number of Pins=2, Packaging="Tape and Reel", Radiation Hardening=No, Termination=SMD/SMT, Voltage Rating (DC)=200V, Weight=0.000353oz, Width=1.6mm
R20: library part CMP-2100-03618-1, "Chip Resistor, 4.7 KOhm, +/- 1%, 0.25 W, -55 to 155 degC, 1206 (3216 Metric), RoHS, Tape and Reel", Case Code (Imperial)=1206, Case Code (Metric)=3216, Manufacturer="Vishay Semiconductor", Max Operating Temperature=155degC, Max Power Dissipation=250mW, Min Operating Temperature=-55degC, Package Description="2-Pin Surface Mount Device, Body 3.15 x 1.6 mm", Package Quantity=10, Package Reference=1206.0, Resistance=4.7KOhm, Temperature Coefficient=100ppm/degreesC, Tolerance=1%, Voltage Rating=200V, Case/Package=1206, Composition=ThickFilm, Contact Plating=Tin, Datasheet URL=http://www.vishay.com/docs/20035/dcrcwe3.pdf, Datasheet Version=41061.0, Depth=1.6mm, Height=0.55mm, Lead Free=LeadFree, Length=3.2mm, Manufacturer URL=http://www.vishay.com/, Military Standard=Not, Mount=SurfaceMount, Number of Terminations=2, Packaging=TapeandReel, Power Rating=250mW, Radiation Hardening=No, REACH SVHC=Unknown, RoHSCompliant=true, Termination=SMD/SMT, Voltage Rating (DC)=200V, Weight=0.000353oz, Width=1.6mm
R24: library part CMP-2003-01940-2, "RES Thick Film, 20kΩ, 1%, 0.25W, 100ppm/°C, 1206", Case Code (Imperial)=1206, Case Code (Metric)=3216, Max Operating Temperature=155°C, Max Power Dissipation=250mW, Min Operating Temperature=-55°C, Package Quantity=10, Resistance=20kR, Temperature Coefficient=100ppm/°C, Tolerance=1%, Voltage Rating=200V, Case/Package=1206, Composition="Thick Film", Contact Plating=Tin, Depth=1.6mm, Features="Automotive AEC-Q200", Height=0.55mm, Lead Free="Lead Free", Length=3.2mm, Military Standard=Not, Mount="Surface Mount", Number of Pins=2, Number of Terminations=2, Packaging="Tape and Reel", Power Rating=250mW, Radiation Hardening=No, Termination=SMD/SMT, Voltage Rating (DC)=200V, Weight=0.000353oz, Width=0.063inch, Working Voltage=200V
TP1 TP2 TP3 TP4 TP5 TP6 TP7 TP8 TP9 TP10 TP11 TP12 TP13 TP14: library part CMP-025-000000-1, Design Item ID=Misc-Generic-TP, Source=Generic.SchLib
U1: library part CMP-00000-2, "IC COMPARATOR QUAD 14TSSOP", Case/Package=TSSOP, Input Bias Current=15nA, Input Offset Voltage (Vos)=3.5mV, Max Operating Temperature=125°C, Min Operating Temperature=-40°C, Output Current=20mA, Quiescent Current=75uA, Lead Free="Lead Free", Max Input Current=15nA, Mount="Surface Mount", Number of Channels=4, Number of Elements=4, Number of Pins=14, Packaging="Tape and Reel", Propagation Delay=560ns, RoHS Compliant=Yes, Type="General Purpose"
U2: library part CMP-2000-07341-2, "IC REG LINEAR 5V 100MA SOT89-3", Dropout Voltage=1.7V, Manufacturer="Texas Instruments", Max Junction Temp=+125°C, Max Supply Voltage=20V, Min Supply Voltage=7V, Nominal Supply Current=3.8mA, Output Current=100mA, Output Voltage=5V, Package=PK0003A, Temperature="0°C to +125°C", Temperature Range Low=0°C, Accuracy Percentage=3.75%, Automotive=No, Category=IC, ComponentLink2Description=Datasheet, ComponentLink2URL=https://www.ti.com/lit/ds/symlink/ua78l.pdf, Device Class L1="Integrated Circuits (ICs)", Device Class L2="Power Management ICs", Device Class L3="Voltage Regulators - Linear", Digikey Description="IC REG LINEAR 5V 100MA SOT89-3", Height=1.6mm, Lead Free=Yes, Manufacturer Part Number=UA78L05CPK, Mouser Description="100-mA, 30-V VIN, Positive-Voltage Linear Regulators 3-SOT-89 0 to 125", Number Of Outputs=1, Octopart=https://octopart.com/ua78l05cpk-texas+instruments-525289, Output Type=Fixed, RoHS=TRUE, Temperature Range High=+125°C

## Free pads (board coordinates)
  round 206.69 hole 118.11: 15(255,180) 15(255,2975) 15(5095,2975)
  round 0 hole 122.05: ""(5095,180)

## Via types
v1: diameter 23.62, hole 11.81, Top Layer to Bottom Layer, 24 vias
v2: diameter 30, hole 15, Top Layer to Bottom Layer, 17 vias
v3: diameter 24, hole 12, Top Layer to Bottom Layer, 13 vias

## Nets (pads, with @x,y where several pads share a name; then routed paths per layer and width w, separated by ;. In a path a pad name is that pad's centre, name@x,y a point inside that pad or via, vN(x,y) a via of type N, cw(c..) or ccw(c..) an arc to the next point about the centre after c; other vN are vias at no path point)
GND: C3.2 C5.2 C6.2 C7.2 C8.2 DS1.2 DS2.2 J1.3 pad.15 PS1.2 R19.2 R24.2 U2.2 | length 1028.9
  Top Layer w10: v3(930,1860) DS2.2 ; v3(1015,345) R24.2 ; DS1.2 v3(1260,2090) 1260,2175 1295,2210 C3.2 ; C6.2 1230,1620 1202,1592 v3(1202,1558) 1202,1528 1230,1500 C5.2 ; v3(1720,760) R19.2 ; C7.2 1800,1500 1825,1525 v3(1825,1560) 1825,1590 1800,1615 C8.2
  other v1: 256,99 202,121 315,125 177,180 339,180 316.55,235.55 200.45,239.55 256,261 255,2895 5095,2895 201,2917 5041,2917 314,2921 5154,2921 176,2976 338,2976 5016,2976 5178,2976 315.55,3031.55 5155.55,3031.55 199.45,3035.55 5039.45,3035.55 255,3057 5095,3057
  other v2: 1340,1040 1440,1040 1540,1040 1640,1040 1740,1040 1340,1132.4 1440,1132.4 1540,1132.4 1640,1132.4 1740,1132.4
ISOLATED-5V: C1.1 C4.1 PS1.7 R13.2 R16.1 R17.2 R18.1 TP7.1 U1.3 | length 3812.6
  Top Layer w10: PS1.7 2510,2220 2460,2170 2460,2004.88 2452.17,1997.05 R17.2 2449.21,1867.05 2449.21,1755.79 2480,1725 TP7.1 ; R13.2 2770,1430 2550,1650 TP7.1 ; v3(2860,210) 3030,210 3115,295 R16.1 3068.98,398.98 3050,380 R18.1 ; U1.3 3114.41,799.41 3095,780 3040,780 2970,850 2860,850 v3(2840,830) C1.1 2735.12,894.88 2480,1150 TP7.1
  Bottom Layer w10: v3(2840,830) 2840,740 v3(2750,650) 2750,250 2790,210 v3(2860,210)
NetC2_1: C2.1 D1.1 R8.2 R9.1 R15.1 TP3.1 U1.9 | length 2026.8
  Top Layer w10: v3(2870,1540) 2870,1542.71 2866.1,1546.6 D1.1 2866.1,1776.1 2940,1850 TP3.1 ; v3(2890,1340) 2930,1340 2950,1320 R15.1 3020,1260 3037.91,1242.09 C2.1 3130,1200 3191.18,1138.82 U1.9 ; R8.2 3169.69,2119.68 3030,1980 TP3.1 ; R9.1 3310,1900 3260,1850 TP3.1
  Bottom Layer w10: v3(2870,1540) 2870,1360 v3(2890,1340)
NetC2_2: C2.2 R13.1 R14.1 TP4.1 U1.8 | length 880.1
  Top Layer w10: R13.1 3030,1430 3082.09,1377.91 C2.2 ; R14.1@3130,1530 R14.1 C2.2 ; U1.8 3216.77,1146.77 3320,1250 TP4.1 3318.96,1378.96 3131.04,1378.96 C2.2
NetC5_1: C5.1 C6.1 D2.1 U2.3 | length 695.9
  Top Layer w20: D2.1 1105.28,1211.97 1111.02,1217.72 1127.72,1217.72 1335,1425 1472.66,1425 U2.3 ; C5.1 1465,1500 1480.94,1484.06 U2.3@1480.94,1425 ; C5.1@1409.09,1530.91 C6.1@1409.09,1620
NetDS1_1: DS1.1 R1.2 | length 114
  Top Layer w10: R1.2 DS1.1
NetDS2_1: DS2.1 R2.2 | length 127.8
  Top Layer w10: DS2.1 R2.2
NetF1_1: F1.1 J1.1 | length 283.6
  Top Layer w27.56: J1.1 615.08,1624.92 670,1570 F1.1
NetJ1_5: J1.5 Q3.3 R24.1 TP11.1 | length 1057.5
  Top Layer w10: J1.5 529.96,745.04 TP11.1 1014.8,505 R24.1 1150.2,505.2 1180,535 Q3.3
NetJ2_1: J2.1 R3.2 R4.2 R5.1 | length 2405.6
  Top Layer w20: v2(4290,855) R3.2 ; v2(4428.52,2001.48) 4428.52,2110 R5.1
  Top Layer w25: R5.1 4930.32,2119.68 5068.11,1981.89 J2.1
  Bottom Layer w20: R4.2 v2(4290,855) ; R3.2 4290,1350 4428.52,1488.52 v2(4428.52,2001.48)
NetJ3_3: J3.3 R3.1 R4.1 TP1.1 | length 1062.1
  Top Layer w20: R3.1 4502.56,1112.56 4547.56,1112.56 4677.53,1242.53 4732.53,1242.53 TP1.1
  Bottom Layer w10: R4.1 R3.1
  Bottom Layer w20: TP1.1 J3.3
NetJ3_4: J3.4 R21.1 R22.1 TP2.1 | length 1917.4
  Top Layer w10: R22.1 3670,1077.64 TP2.1 3670,760 R21.1 4000,690 4400,690 4841.89,1131.89 J3.4
NetQ1_1: Q1.1 R15.2 R16.2 TP5.1 U1.14 | length 1362.5
  Top Layer w10: R15.2 2847.54,1132.46 2893.86,1086.14 U1.14 v3(3063.23,1016.77) ; Q1.1 2944.88,521.02 R16.2 3115,590 3180,655 v3(3180,700) ; R16.2@3115.09,520.93 3284.07,520.93 TP5.1 3285,530 TP5.1@3280,535
  Bottom Layer w10: v3(3063.23,1016.77) 3180,900 v3(3180,700)
NetQ1_3: Q1.3 Q2.2 TP12.1 | length 583.1
  Top Layer w10: Q2.2 2400,660 2420,640 TP12.1 2650,640 2730,560 Q1.3 ; TP12.1@2530,620 2539.17,629.17 TP12.1@2541.22,629.17
NetQ2_1: Q2.1 R18.2 TP9.1 | length 692.9
  Top Layer w10: Q2.1 2330,450 2400,380 TP9.1 R18.2
NetQ2_4: Q2.4 R19.1 | length 150
  Top Layer w10: R19.1 Q2.4
NetQ2_5: Q2.5 Q3.1 R20.1 TP10.1 | length 1209.6
  Top Layer w10: R20.1 1140.04,839.96 1217.4,762.6 Q3.1@1217.4,660 ; Q2.5 1980,660 1880,560 TP10.1 1400,560 1300,660 Q3.1@1217.4,660 ; Q3.1@1217.4,660 1216.77,660 Q3.1 Q3.1@1217.4,660
NetR5_2: R5.2 R6.1 | length 221.2
  Top Layer w10: R6.1 R5.2
NetR6_2: R6.2 R7.1 | length 235.1
  Top Layer w10: R7.1 R6.2
NetR7_2: R7.2 R8.1 | length 207.6
  Top Layer w10: R8.1 R7.2
NetR9_2: R9.2 R10.1 | length 118
  Top Layer w15: R9.2 R10.1
NetR10_2: R10.2 R11.1 | length 109
  Top Layer w15: R10.2 R11.1
NetR11_2: R11.2 R12.1 | length 108
  Top Layer w15: R11.2 R12.1
P5V: C3.1 C7.1 C8.1 PS1.1 R2.1 TP6.1 TP14.1 U2.1 | length 1587.9
  Top Layer w10: R2.1 TP14.1 ; C3.1 TP6.1 ; U2.1 1599.06,1484.06 1615,1500 C7.1 C8.1 1650,1700 1580,1770 TP14.1 ; PS1.1 1805,2210 TP6.1 ; TP14.1 1580,2040 1650,2110 TP6.1
TS-: C1.2 C4.2 D1.2 J2.4 PS1.5 Q1.2 R12.2 R14.2 R17.1 R21.2 R22.2 TP8.1 U1.12 | length 7970.3
  Top Layer w10: PS1.5 2310,2200 2344.88,2165.12 C4.2 2347.83,1997.05 R17.1 v2(2347.83,1410) ; v2(2710,760) 2740,730 2860,730 2943.31,646.69 Q1.2 ; v2(2740,1010) 2835.12,1010 C1.2 2954.88,1005.12 3000,960 3080,960 3114.41,994.41 U1.12 ; D1.2 2955.13,1631.23 v2(3035.15,1631.23)
  Top Layer w15: v2(3035.15,1174.85) 3085.15,1174.85 3114.41,1145.59 U1.12
  Top Layer w25: v2(3035.15,1631.23) R14.2 3130.61,1630.61 3679.39,1630.61 TP8.1 ; R21.2 3620,510 3520,510 3430,600 3430,1240 3480,1290 3657.64,1290 R22.2 3869.96,1440.04 TP8.1 ; J2.4 4568.11,1771.89 4440,1900 R12.2 4272.05,1722.05 4180,1630 TP8.1
  Bottom Layer w10: v2(2347.83,1410) 2347.83,882.17 2500,730 2680,730 v2(2710,760) 2740,790 v2(2740,1010)
  Bottom Layer w25: v2(3035.15,1174.85) v2(3035.15,1631.23)
VBATT: D2.2 F1.2 Q3.2 R1.1 R20.2 TP13.1 | length 2093.1
  Top Layer w20: R1.1 765,2090 735,2060 735,1890 889.21,1735.79 F1.2 889.21,1420.79 1014.72,1295.28 D2.2@1014.72,1211.97 ; D2.2 1017.34,1207.38 1017.34,942.62 R20.2 910,940 810,840 TP13.1 Q3.2@1142.6,660
pads on no net: J1.2 J1.4 J1.6 J1.7 J1.8 J1.9 J1.10 J1.11 J1.12 J1.13 J1.14 J1.None J2.2 J2.3 J2.None J3.1 J3.2 J3.None PS1.6 Q2.3 Q2.6 U1.1 U1.2 U1.4 U1.5 U1.6 U1.7 U1.10 U1.11 U1.13

## Polygon pours and split planes (outlines as drawn)
GND on Top Layer "NONET_L-01_P-001" (solid, pour order 14): 1496.69,1445 1459.33,1445 1240,1210 1240,950 1850,950 1850,1220 1625,1445 1583.31,1445 1583.31,1550 1496.69,1550
GND on Bottom Layer "GND_L02_P000" (solid, pour order 0): 2075,-6.1 246.77,-6.1 cw(c246.76,233.9) 6.77,233.9 6.77,2918.93 cw(c244.26,2916.41) 246.77,3153.9 5083.62,3153.9 cw(c5095.72,2913.24) 5336.62,2907.37 5336.81,2682.45 2075,2677.57

## Silkscreen, mask and mechanical layers (free items; w line width, h text height)
Top Overlay:
  drawing of 61 lines, arcs and shapes, not listed
  text "GLV" at 5070,2700 h80
  text "HR25E High Voltage Monitor V1.2 Design: Zerong Cai" at 1290,2555 h60
  text "Seperation  / 4.57 mm" at 2530,2535 h30
  text "<---->" at 2885,2505 h28 r90
  text "HV" at 5130,2380 h80
  text "NC" at 4968,2273 h48
  text "HV+" at 5128,2273 h48
  text "HV-" at 4943,2173 h48
  text "NC" at 5138,2173 h48
  text "NC" at 5138,793 h48
  text "TSMP+" at 4828,788 h48
  text "TSMP-" at 4828,693 h48
  text "NC" at 5138,693 h48
  text "TP5" at 3225,575 h60
Mechanical 1:
  lines w10: 240,0 cw(c240,240) 0,239.99 0,2920 cw(c240,2920) 240,3160 ; 240,3160.12 5089.88,3160.12 ; 244.99,0 5093.24,0 ; 5088.24,0 ccw(c5088.24,241.76) 5330,241.76 5330,2920 ; 5090,3160 cw(c5093.01,2922.86) 5330.15,2925.87

## Text inside footprints (layer, text, board x,y; h text height)
J1: Mechanical 4 "PCB edge" at -92.35,1462.06 h73.82 r270; Mechanical 4 "PCB edge" at -92.35,1462.06 h73.82 r270